# EAGLE board Eagle Board (EAGLE 7.6.0)

Size 73.58 x 63.39 mm. Coordinates in mm from the lower left corner, seen from the top.
Outline: 0,0 56.82,0 56.82,53.33 0,53.33 0,0
Copper layers (1*16): Top 0.035mm / dielectric 1.5mm / Bottom 0.035mm
Design rules "default": minimum track width 10mil, minimum drill 24mil, track to track 8mil, track to pad 8mil, pad to pad 8mil, via to via 8mil, smd to smd 8mil, copper to edge 40mil, drill to drill 8mil, minimum pad ring 10mil, minimum via ring 8mil, stop-mask expansion 4mil, vias tented up to drill 0mil, thermal gap 10mil

## Footprints (pad centres in the part's own frame; a part is rotated, then mirrored left to right if it is on the bottom)
HDSP-M = drill 0.813 long: 1 -5.08,-7.62; 2 -2.54,-7.62; 3 0,-7.62; 4 2.54,-7.62; 5 5.08,-7.62; 6 5.08,7.62; 7 2.54,7.62; 8 0,7.62; 9 -2.54,7.62; 10 -5.08,7.62
0207/10 = drill 0.813 octagon: 1 -5.08,0; 2 5.08,0
TO92 = drill 0.813 octagon: 1 1.27,0; 2 0,1.905; 3 -1.27,0
ARDUINO_UNO = drill 1.016 pad 1.88: 0 63.5,50.8; 1 60.96,50.8; 2 58.42,50.8; 3 55.88,50.8; 3.3V 35.56,2.54; 4 53.34,50.8; 5 50.8,50.8; 5V 38.1,2.54; 6 48.26,50.8; 7 45.72,50.8; 8 41.656,50.8; 9 39.116,50.8; 10 36.576,50.8; 11 34.036,50.8; 12 31.496,50.8; 13 28.956,50.8; A0 50.8,2.54; A1 53.34,2.54; A2 55.88,2.54; A3 58.42,2.54; A4 60.96,2.54; A5 63.5,2.54; AREF 23.876,50.8; GND 26.416,50.8; GND. 43.18,2.54; GND.. 40.64,2.54; I/OREF 30.48,2.54; N/C 27.94,2.54; RESET 33.02,2.54; SCL 18.796,50.8; SDA 21.336,50.8; VIN 45.72,2.54 | hole 3.2: 66.04,7.62; 66.04,35.56; 15.24,50.8; 13.97,2.54

## Placement (x,y rotation side)
Digitdisplay1  [HDSP-M]  5,22.78 0 top
Digitdisplay2  [HDSP-M]  5,35.48 0 top
Digitdisplay3  [HDSP-M]  5,48.18 0 top
R1  100k‎Ω  [0207/10]  5,98.98 0 top  (outside the outline)
R2  100k‎Ω  [0207/10]  5,111.68 0 top  (outside the outline)
R3  100k‎Ω  [0207/10]  5,124.38 0 top  (outside the outline)
R4  1k‎Ω  [0207/10]  5,137.08 0 top  (outside the outline)
R5  1k‎Ω  [0207/10]  5,149.78 0 top  (outside the outline)
R6  1k‎Ω  [0207/10]  5,162.48 0 top  (outside the outline)
R7  1k‎Ω  [0207/10]  5,175.18 0 top  (outside the outline)
R8  1k‎Ω  [0207/10]  5,187.88 0 top  (outside the outline)
R9  1k‎Ω  [0207/10]  5,200.58 0 top  (outside the outline)
R10  1k‎Ω  [0207/10]  5,213.28 0 top  (outside the outline)
T1  [TO92]  5,60.88 0 top
T2  [TO92]  5,73.58 0 top  (outside the outline)
T3  [TO92]  5,86.28 0 top  (outside the outline)
U1  [ARDUINO_UNO]  5,10.08 0 top

## Library data of the parts
Digitdisplay1-Digitdisplay3 R1-R10 T1-T3 U1 = AUTODESK_CIRCUITS_BREADBOARD

## Nets
N$1: U1.GND.
N$2: Digitdisplay1.10 Digitdisplay2.10 Digitdisplay3.10 R10.2
N$3: Digitdisplay2.3
N$4: Digitdisplay2.5
N$5: Digitdisplay3.3 R7.2
N$6: Digitdisplay3.5
N$7: Digitdisplay1.7 Digitdisplay2.7 Digitdisplay3.7 R4.2
N$8: Digitdisplay1.1 Digitdisplay2.1 Digitdisplay3.1 R8.2
N$9: Digitdisplay1.4 Digitdisplay2.4 Digitdisplay3.4 R6.2
N$10: Digitdisplay1.3
N$11: Digitdisplay1.2 Digitdisplay2.2 Digitdisplay3.2
N$12: Digitdisplay1.5
N$13: Digitdisplay1.6 Digitdisplay2.6 Digitdisplay3.6 R5.2
N$14: T1.3 T2.3 T3.3 U1.5V
N$15: R3.2 T1.2
N$16: Digitdisplay3.8 T1.1
N$17: R2.2 T2.2
N$18: Digitdisplay2.8 T2.1
N$19: R1.2 T3.2
N$20: Digitdisplay1.8 T3.1
N$21: R2.1 U1.12
N$22: R1.1 U1.13
N$23: R3.1 U1.11
N$24: R4.1 U1.9
N$25: R5.1 U1.8
N$26: R7.1 U1.6
N$27: R6.1 U1.7
N$28: R8.1 U1.5
N$29: Digitdisplay1.9 Digitdisplay2.9 Digitdisplay3.9 R9.2
N$30: R9.1 U1.4
N$31: R10.1 U1.3

## Tracks (layer width: path | path; a pad name or v marks a point on that pad's centre or on a via)
N$2  (3 unrouted)
N$5  (1 unrouted)
N$7  (3 unrouted)
N$8  (3 unrouted)
N$9  (3 unrouted)
N$11  (2 unrouted)
N$13  (3 unrouted)
N$14  (3 unrouted)
N$15  (1 unrouted)
N$16  (1 unrouted)
N$17  (1 unrouted)
N$18  (1 unrouted)
N$19  (1 unrouted)
N$20  (1 unrouted)
N$21  (1 unrouted)
N$22  (1 unrouted)
N$23  (1 unrouted)
N$24  (1 unrouted)
N$25  (1 unrouted)
N$26  (1 unrouted)
N$27  (1 unrouted)
N$28  (1 unrouted)
N$29  (3 unrouted)
N$30  (1 unrouted)
N$31  (1 unrouted)